# Altium PCB 多通道.PcbDoc (part 2 of 2)
Units mm, origin at the board's own origin, x right, y up, seen from the top; angles counter-clockwise.
Board outline 95 x 34 mm, 2 copper layers (Top Layer, Bottom Layer); 165 components, 129 nets, 558 pads, 145 vias.
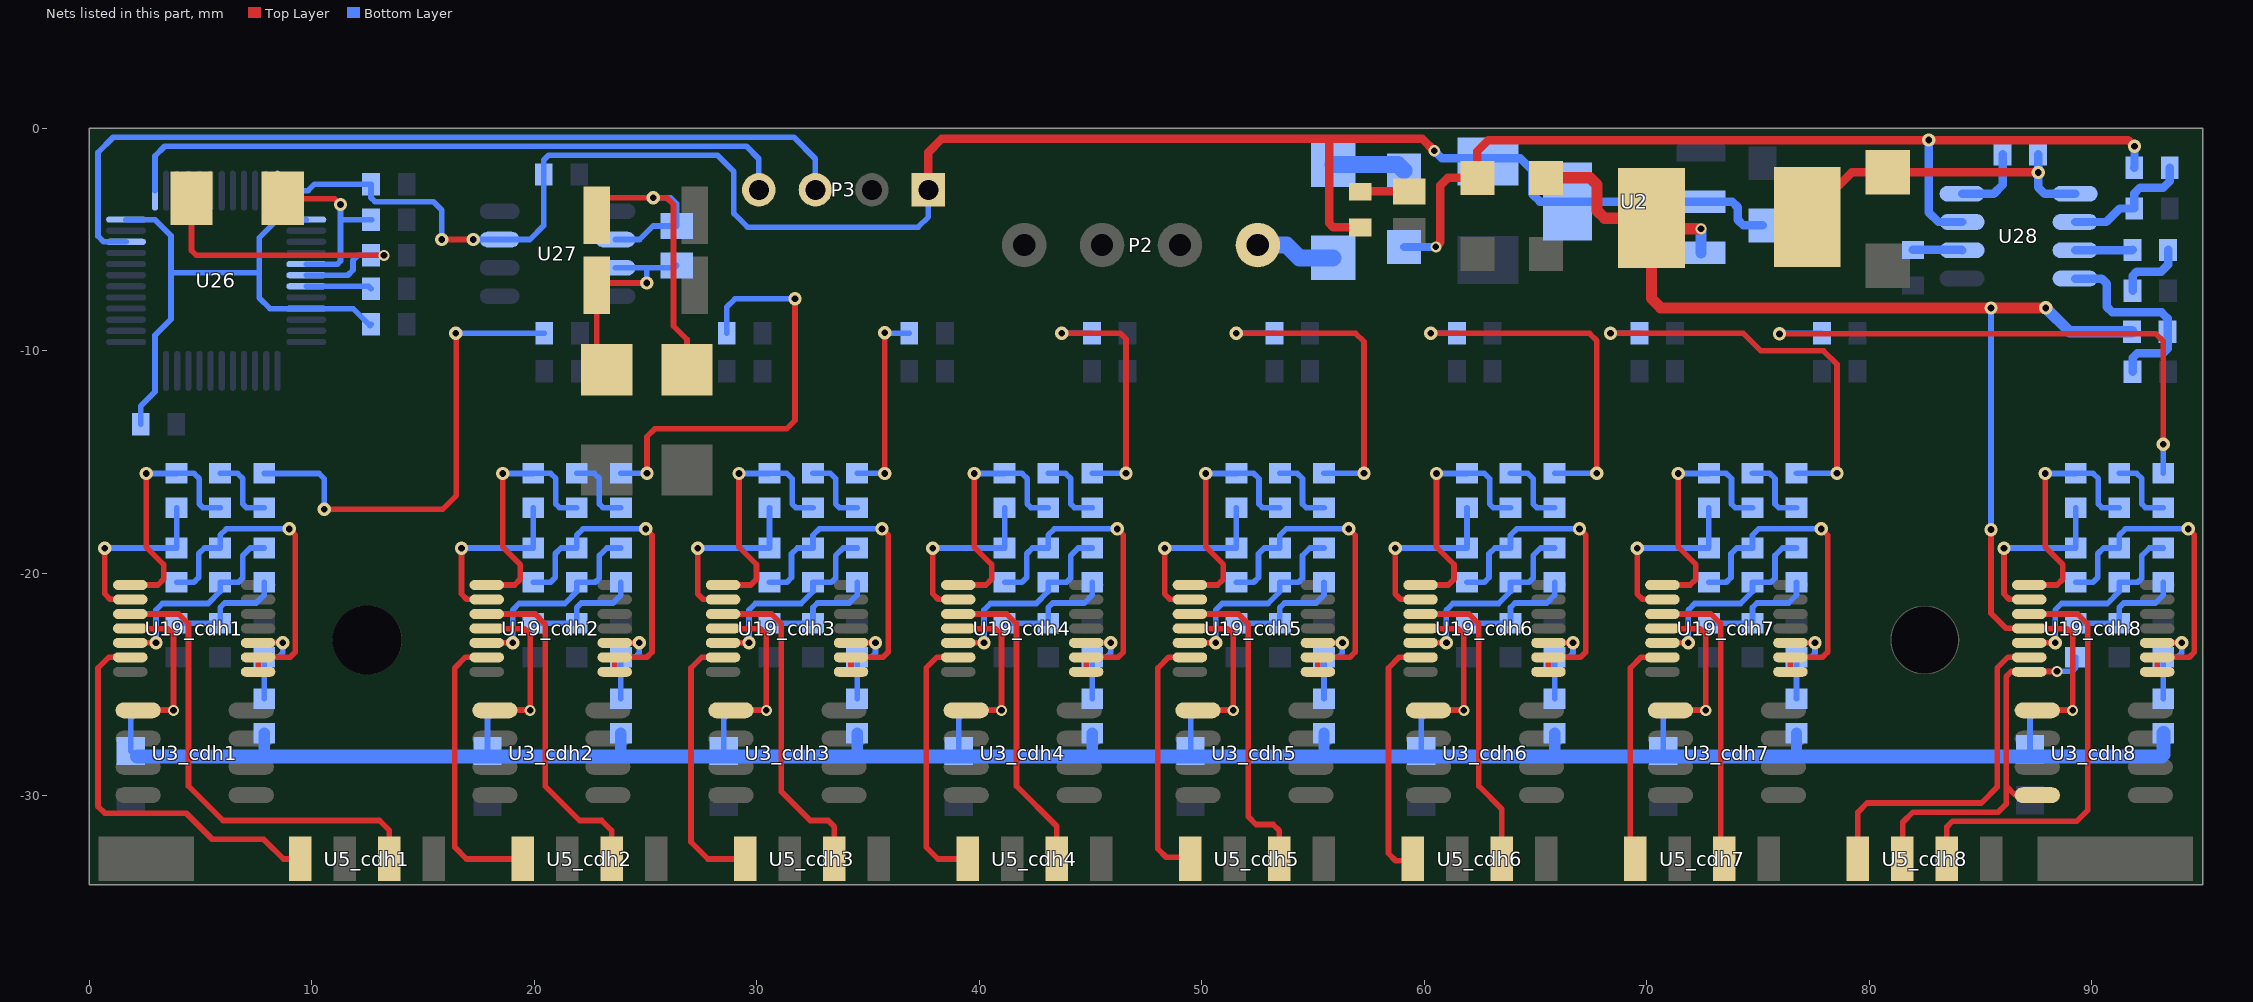
[diagram p2: the nets of this part, all layers, seen from the top]

## Via types
v1: diameter 0.6, hole 0.3, Top Layer to Bottom Layer, tented both sides, 103 vias
v2: diameter 0.5, hole 0.3, Top Layer to Bottom Layer, 39 vias
v3: diameter 0.5, hole 0.3, Top Layer to Bottom Layer, tented both sides, 3 vias

## Nets (pads, with @x,y where several pads share a name; then routed paths per layer and width w, separated by ;. In a path a pad name is that pad's centre, name@x,y a point inside that pad or via, vN(x,y) a via of type N, cw(c..) or ccw(c..) an arc to the next point about the centre after c; other vN are vias at no path point) (continued)
H1_IN3_cdh8: R18_cdh8.1 U3_cdh8.4 U5_cdh8.2 U19_cdh8.7 | length 16.7
  Top Layer w0.254: U5_cdh8.2@81.487,-32.842 81.509,-32.821 81.509,-31.191 81.966,-30.734 85.801,-30.734 86.157,-30.378 86.157,-29.566 ; U3_cdh8.4@86.553,-29.961 86.157,-29.566 ; v2@88.434,-24.418 86.376,-24.418 86.157,-24.638 86.157,-29.566 ; v2@88.434,-24.409 v2(88.443,-24.409)
  Bottom Layer w0.254: v2(88.443,-24.409) 89.103,-24.409 89.281,-24.232 R18_cdh8.1@89.281,-23.782
H1_OUT2_cdh1: U5_cdh1.3 U19_cdh1.3 | length 21.2
  Top Layer w0.254: U19_cdh1.3@1.849,-21.829 4.024,-21.829 4.47,-22.276 4.47,-29.566 6.02,-31.115 13.056,-31.115 13.487,-31.547 U5_cdh1.3@13.487,-32.842
H1_OUT2_cdh2: U5_cdh2.3 U19_cdh2.3 | length 15.2
  Top Layer w0.254: U19_cdh2.3@17.877,-21.829 20.051,-21.829 20.498,-22.276 20.498,-29.566 22.047,-31.115 23.038,-31.115 23.487,-31.565 U5_cdh2.3@23.487,-32.842
H1_OUT2_cdh3: U5_cdh3.3 U19_cdh3.3 | length 14.8
  Top Layer w0.254: U19_cdh3.3@28.494,-21.829 30.668,-21.829 31.115,-22.276 31.115,-29.82 32.41,-31.115 33.223,-31.115 33.487,-31.379 U5_cdh3.3@33.487,-32.842
H1_OUT2_cdh4: U5_cdh4.3 U19_cdh4.3 | length 14.1
  Top Layer w0.254: U19_cdh4.3@39.06,-21.829 41.235,-21.829 41.681,-22.276 41.681,-29.566 43.487,-31.372 U5_cdh4.3@43.487,-32.842
H1_OUT2_cdh5: U5_cdh5.3 U19_cdh5.3 | length 14.6
  Top Layer w0.254: U19_cdh5.3@49.474,-21.829 51.649,-21.829 52.095,-22.276 52.095,-30.937 52.451,-31.293 53.213,-31.293 53.487,-31.567 U5_cdh5.3@53.487,-32.842 U5_cdh5.3@53.638,-32.691
H1_OUT2_cdh6: U5_cdh6.3 U19_cdh6.3 | length 13.8
  Top Layer w0.254: U19_cdh6.3@59.838,-21.829 62.012,-21.829 62.459,-22.276 62.459,-29.566 63.487,-30.594 U5_cdh6.3@63.487,-32.842 U5_cdh6.3@63.5,-32.83
H1_OUT2_cdh7: U5_cdh7.3 U19_cdh7.3 | length 13.4
  Top Layer w0.254: U19_cdh7.3@70.709,-21.829 72.883,-21.829 73.33,-22.276 73.33,-32.685 U5_cdh7.3@73.487,-32.842
H1_OUT2_cdh8: U5_cdh8.3 U19_cdh8.3 | length 19.3
  Top Layer w0.254: U5_cdh8.3@83.487,-32.842 83.487,-31.397 83.744,-31.14 89.332,-31.14 89.814,-30.658 89.814,-22.276 89.368,-21.829 U19_cdh8.3@87.193,-21.829
H1_OUT4_cdh1: U5_cdh1.1 U19_cdh1.6 | length 17.9
  Top Layer w0.254: U19_cdh1.6@1.849,-23.779 1.839,-23.768 0.895,-23.768 0.406,-24.257 0.406,-30.48 0.711,-30.785 4.369,-30.785 5.537,-31.953 7.849,-31.953 8.738,-32.842 U5_cdh1.1@9.487,-32.842
H1_OUT4_cdh2: U5_cdh2.1 U19_cdh2.6 | length 13
  Top Layer w0.254: U19_cdh2.6@17.877,-23.779 17.866,-23.768 16.922,-23.768 16.434,-24.257 16.434,-32.309 16.967,-32.842 U5_cdh2.1@19.487,-32.842
H1_OUT4_cdh3: U5_cdh3.1 U19_cdh3.6 | length 12.2
  Top Layer w0.254: U19_cdh3.6@28.494,-23.779 28.483,-23.768 27.54,-23.768 27.051,-24.257 27.051,-32.08 27.813,-32.842 U5_cdh3.1@29.487,-32.842
H1_OUT4_cdh4: U5_cdh4.1 U19_cdh4.6 | length 11.8
  Top Layer w0.254: U19_cdh4.6@39.06,-23.779 39.05,-23.768 38.106,-23.768 37.617,-24.257 37.617,-32.309 38.151,-32.842 U5_cdh4.1@39.487,-32.842
H1_OUT4_cdh5: U5_cdh5.1 U19_cdh5.6 | length 17.4
  Top Layer w0.254: 48.031,-30.48 48.031,-24.257 48.52,-23.768 49.464,-23.768 U19_cdh5.6@49.474,-23.779 ; 48.031,-24.486 48.031,-32.385 48.412,-32.766 49.411,-32.766 U5_cdh5.1@49.487,-32.842
H1_OUT4_cdh6: U5_cdh6.1 U19_cdh6.6 | length 11.2
  Top Layer w0.254: U5_cdh6.1@59.487,-32.842 59.411,-32.918 58.725,-32.918 58.395,-32.588 58.395,-24.257 58.883,-23.768 59.827,-23.768 U19_cdh6.6@59.838,-23.779
H1_OUT4_cdh7: U5_cdh7.1 U19_cdh7.6 | length 10.3
  Top Layer w0.254: U5_cdh7.1@69.487,-32.842 69.266,-32.621 69.266,-24.257 69.754,-23.768 70.698,-23.768 U19_cdh7.6@70.709,-23.779
H1_OUT4_cdh8: U5_cdh8.1 U19_cdh8.6 | length 15.8
  Top Layer w0.254: U5_cdh8.1@79.487,-32.842 79.487,-30.749 79.908,-30.328 85.039,-30.328 85.75,-29.616 85.75,-24.257 86.239,-23.768 87.183,-23.768 U19_cdh8.6@87.193,-23.779
JTCK: P3.4 U26.37 | length 30.5
  Bottom Layer w0.254: U26.37@2.965,-2.808 2.965,-1.251 3.404,-0.813 29.54,-0.813 30.099,-1.372 P3.4@30.099,-2.769
JTMS: P3.3 U26.34 | length 39.4
  Bottom Layer w0.254: U26.34@1.665,-5.108 0.663,-5.108 0.406,-4.851 0.406,-1.092 1.092,-0.406 31.674,-0.406 32.639,-1.372 P3.3@32.639,-2.769
NetC16_1: C16.1 U26.5 Y1.1 | length 8.1
  Top Layer w0.254: Y1.1@8.788,-3.175 11.049,-3.175 v1(11.303,-3.429)
  Bottom Layer w0.254: U26.5@9.765,-6.108 11.164,-6.108 11.303,-5.969 v1(11.303,-3.429) ; 11.354,-4.115 C16.1@12.675,-4.115 C16.1@12.7,-4.115
NetC17_1: C17.1 U26.6 Y1.2 | length 15.2
  Top Layer w0.254: Y1.2@4.605,-3.15 4.605,-5.494 4.826,-5.715 v2(13.259,-5.715)
  Bottom Layer w0.254: U26.6@9.765,-6.608 11.629,-6.608 11.862,-6.375 11.862,-5.944 12.09,-5.715 C17.1@12.675,-5.715 v2(13.259,-5.715)
NetC21_1: C21.1 D12.2 L1.1 U28.1 | length 14.5
  Top Layer w0.381: L1.1@77.216,-3.988 79.214,-1.989 D12.2@80.823,-1.989 v1(87.596,-1.989)
  Bottom Layer w0.381: C21.1@87.592,-1.168 87.592,-2.654 87.884,-2.946 U28.1@89.256,-2.946
NetC21_2: C21.2 U28.8 | length 3.4
  Bottom Layer w0.381: U28.8@84.176,-2.946 85.598,-2.946 85.992,-2.553 C21.2@85.992,-1.168
NetC23_1: C23.1 F3.2 R107.1 U28.7 | length 43
  Top Layer w0.381: v3(60.528,-5.334) 60.731,-5.131 60.731,-2.565 61.067,-2.23 C23.1@62.393,-2.23 62.393,-1.031 62.89,-0.533 91.643,-0.533 v1(91.923,-0.813)
  Bottom Layer w0.381: F3.2@59.096,-5.34 60.523,-5.34 v3(60.528,-5.334) ; v1(82.677,-0.533) 82.677,-3.785 83.109,-4.216 U28.7@84.176,-4.216 ; R107.1@91.91,-1.778 91.923,-1.766 v1(91.923,-0.813)
NetC24_1: C24.1 R112.1 | length 3.1
  Bottom Layer w0.381: R112.1@91.834,-7.303 91.834,-6.642 92.024,-6.452 93.116,-6.452 93.434,-6.134 C24.1@93.434,-5.471
NetC24_2: C24.2 U28.3 | length 2.6
  Bottom Layer w0.381: U28.3@89.256,-5.486 91.819,-5.486 C24.2@91.834,-5.471
NetD10_A: D10.A R106.2 | length 2.2
  Top Layer w0.381: R106.2@57.138,-2.844 D10.A@59.334,-2.844
  Top Layer w0.508: R106.2@57.125,-2.858 R106.2@57.138,-2.844
NetD11_2: D11.2 F3.1 | length 3.3
  Bottom Layer w0.762: D11.2@55.905,-1.634 58.819,-1.634 F3.1@59.096,-1.911
NetD14_2: D14.2 F10.2 R105.2 U27.7 | length 9.8
  Top Layer w0.254: D14.2@23.266,-10.856 22.819,-10.409 F10.2@22.819,-7.061 22.921,-6.96 v1(25.07,-6.96)
  Bottom Layer w0.254: U27.7@23.657,-6.274 25.044,-6.274 ; v1(25.07,-6.96) 25.07,-6.299 25.044,-6.274 ; R105.2@26.416,-6.173 26.315,-6.274 25.044,-6.274
NetD15_2: D15.2 F11.2 R105.1 U27.6 | length 16.4
  Top Layer w0.254: F11.2@22.86,-3.124 v1(25.349,-3.124) 25.959,-3.124 26.264,-3.429 26.264,-8.89 26.873,-9.5 D15.2@26.873,-10.856
  Bottom Layer w0.254: U27.6@23.657,-5.004 24.74,-5.004 25.35,-4.393 R105.1@26.416,-4.393 26.416,-3.404 26.137,-3.124 v1(25.349,-3.124)
NetR3_cdh1_1: R3_cdh1.1 R14_cdh1.1 U19_cdh1.2 | length 8.4
  Top Layer w0.254: v1(0.711,-18.872) 0.711,-20.93 0.95,-21.168 1.86,-21.168 U19_cdh1.2@1.849,-21.179
  Bottom Layer w0.254: v1(0.711,-18.872) 0.719,-18.864 R14_cdh1.1@3.937,-18.864 R3_cdh1.1@3.937,-17.051
NetR3_cdh1_2: R3_cdh1.2 R4_cdh1.1 U19_cdh1.1 | length 11.3
  Top Layer w0.254: U19_cdh1.1@1.849,-20.529 3.093,-20.529 3.353,-20.269 3.353,-19.609 2.566,-18.822 v1(2.565,-15.519)
  Bottom Layer w0.254: v1(2.565,-15.519) 3.929,-15.519 R3_cdh1.2@3.937,-15.511 4.716,-15.511 4.953,-15.748 4.953,-16.891 5.113,-17.051 R4_cdh1.1@5.893,-17.051
NetR3_cdh2_1: R3_cdh2.1 R14_cdh2.1 U19_cdh2.2 | length 8.4
  Top Layer w0.254: v1(16.739,-18.872) 16.739,-20.93 16.977,-21.168 17.887,-21.168 U19_cdh2.2@17.877,-21.179
  Bottom Layer w0.254: v1(16.739,-18.872) 16.747,-18.864 R14_cdh2.1@19.964,-18.864 R3_cdh2.1@19.964,-17.051
NetR3_cdh2_2: R3_cdh2.2 R4_cdh2.1 U19_cdh2.1 | length 11.3
  Top Layer w0.254: U19_cdh2.1@17.877,-20.529 19.12,-20.529 19.38,-20.269 19.38,-19.609 18.593,-18.822 18.593,-17.947 ; 18.593,-17.947 v1(18.593,-15.519)
  Bottom Layer w0.254: v1(18.593,-15.519) 19.956,-15.519 R3_cdh2.2@19.964,-15.511 20.744,-15.511 20.98,-15.748 20.98,-16.891 21.141,-17.051 R4_cdh2.1@21.92,-17.051
NetR3_cdh3_1: R3_cdh3.1 R14_cdh3.1 U19_cdh3.2 | length 8.4
  Top Layer w0.254: v1(27.356,-18.872) 27.356,-20.93 27.595,-21.168 28.505,-21.168 U19_cdh3.2@28.494,-21.179
  Bottom Layer w0.254: v1(27.356,-18.872) 27.364,-18.864 R14_cdh3.1@30.582,-18.864 R3_cdh3.1@30.582,-17.051
NetR3_cdh3_2: R3_cdh3.2 R4_cdh3.1 U19_cdh3.1 | length 11.3
  Top Layer w0.254: U19_cdh3.1@28.494,-20.529 29.738,-20.529 29.997,-20.269 29.997,-19.609 29.211,-18.822 29.211,-17.947 ; 29.21,-17.947 v1(29.21,-15.519)
  Bottom Layer w0.254: v1(29.21,-15.519) 30.574,-15.519 R3_cdh3.2@30.582,-15.511 31.361,-15.511 31.598,-15.748 31.598,-16.891 31.758,-17.051 R4_cdh3.1@32.537,-17.051
NetR3_cdh4_1: R3_cdh4.1 R14_cdh4.1 U19_cdh4.2 | length 8.4
  Top Layer w0.254: v1(37.922,-18.872) 37.922,-20.93 38.161,-21.168 39.071,-21.168 U19_cdh4.2@39.06,-21.179
  Bottom Layer w0.254: v1(37.922,-18.872) 37.93,-18.864 R14_cdh4.1@41.148,-18.864 R3_cdh4.1@41.148,-17.051
NetR3_cdh4_2: R3_cdh4.2 R4_cdh4.1 U19_cdh4.1 | length 11.3
  Top Layer w0.254: U19_cdh4.1@39.06,-20.529 40.304,-20.529 40.564,-20.269 40.564,-19.609 39.777,-18.822 39.777,-17.947 ; 39.776,-17.947 v1(39.776,-15.519)
  Bottom Layer w0.254: v1(39.776,-15.519) 41.14,-15.519 R3_cdh4.2@41.148,-15.511 41.927,-15.511 42.164,-15.748 42.164,-16.891 42.324,-17.051 R4_cdh4.1@43.104,-17.051
NetR3_cdh5_1: R3_cdh5.1 R14_cdh5.1 U19_cdh5.2 | length 8.4
  Top Layer w0.254: v1(48.336,-18.872) 48.336,-20.93 48.575,-21.168 49.485,-21.168 U19_cdh5.2@49.474,-21.179
  Bottom Layer w0.254: v1(48.336,-18.872) 48.344,-18.864 R14_cdh5.1@51.562,-18.864 R3_cdh5.1@51.562,-17.051
NetR3_cdh5_2: R3_cdh5.2 R4_cdh5.1 U19_cdh5.1 | length 11.3
  Top Layer w0.254: U19_cdh5.1@49.474,-20.529 50.718,-20.529 50.978,-20.269 50.978,-19.609 50.191,-18.822 50.191,-17.947 ; 50.19,-17.947 v1(50.19,-15.519)
  Bottom Layer w0.254: v1(50.19,-15.519) 51.554,-15.519 R3_cdh5.2@51.562,-15.511 52.341,-15.511 52.578,-15.748 52.578,-16.891 52.738,-17.051 R4_cdh5.1@53.518,-17.051
NetR3_cdh6_1: R3_cdh6.1 R14_cdh6.1 U19_cdh6.2 | length 8.4
  Top Layer w0.254: v1(58.699,-18.872) 58.699,-20.93 58.938,-21.168 59.848,-21.168 U19_cdh6.2@59.838,-21.179
  Bottom Layer w0.254: v1(58.699,-18.872) 58.707,-18.864 R14_cdh6.1@61.925,-18.864 R3_cdh6.1@61.925,-17.051
NetR3_cdh6_2: R3_cdh6.2 R4_cdh6.1 U19_cdh6.1 | length 11.3
  Top Layer w0.254: U19_cdh6.1@59.838,-20.529 61.081,-20.529 61.341,-20.269 61.341,-19.609 60.554,-18.822 60.554,-17.947 ; 60.554,-17.947 v1(60.554,-15.519)
  Bottom Layer w0.254: v1(60.554,-15.519) 61.917,-15.519 R3_cdh6.2@61.925,-15.511 62.705,-15.511 62.941,-15.748 62.941,-16.891 63.102,-17.051 R4_cdh6.1@63.881,-17.051
NetR3_cdh7_1: R3_cdh7.1 R14_cdh7.1 U19_cdh7.2 | length 8.4
  Top Layer w0.254: v1(69.571,-18.872) 69.571,-20.93 69.809,-21.168 70.719,-21.168 U19_cdh7.2@70.709,-21.179
  Bottom Layer w0.254: v1(69.571,-18.872) 69.579,-18.864 R14_cdh7.1@72.796,-18.864 R3_cdh7.1@72.796,-17.051
NetR3_cdh7_2: R3_cdh7.2 R4_cdh7.1 U19_cdh7.1 | length 11.3
  Top Layer w0.254: U19_cdh7.1@70.709,-20.529 71.952,-20.529 72.212,-20.269 72.212,-19.609 71.425,-18.822 71.425,-17.947 ; 71.425,-17.947 v1(71.425,-15.519)
  Bottom Layer w0.254: v1(71.425,-15.519) 72.788,-15.519 R3_cdh7.2@72.796,-15.511 73.576,-15.511 73.812,-15.748 73.812,-16.891 73.973,-17.051 R4_cdh7.1@74.752,-17.051
NetR3_cdh8_1: R3_cdh8.1 R14_cdh8.1 U19_cdh8.2 | length 8.4
  Top Layer w0.254: v1(86.055,-18.872) 86.055,-20.93 86.294,-21.168 87.204,-21.168 U19_cdh8.2@87.193,-21.179
  Bottom Layer w0.254: v1(86.055,-18.872) 86.063,-18.864 R14_cdh8.1@89.281,-18.864 R3_cdh8.1@89.281,-17.051
NetR3_cdh8_2: R3_cdh8.2 R4_cdh8.1 U19_cdh8.1 | length 11.3
  Top Layer w0.254: U19_cdh8.1@87.193,-20.529 88.437,-20.529 88.697,-20.269 88.697,-19.609 87.91,-18.822 87.91,-17.947 ; 87.909,-17.947 v1(87.909,-15.519)
  Bottom Layer w0.254: v1(87.909,-15.519) 89.273,-15.519 R3_cdh8.2@89.281,-15.511 90.06,-15.511 90.297,-15.748 90.297,-16.891 90.457,-17.051 R4_cdh8.1@91.237,-17.051
NetR4_cdh1_2: R4_cdh1.2 R22_cdh1.1 | length 3.3
  Bottom Layer w0.254: R4_cdh1.2@5.893,-15.511 6.672,-15.511 6.909,-15.748 6.909,-16.891 7.069,-17.051 R22_cdh1.1@7.874,-17.051
NetR4_cdh2_2: R4_cdh2.2 R22_cdh2.1 | length 3.3
  Bottom Layer w0.254: R4_cdh2.2@21.92,-15.511 22.7,-15.511 22.936,-15.748 22.936,-16.891 23.097,-17.051 R22_cdh2.1@23.901,-17.051
NetR4_cdh3_2: R4_cdh3.2 R22_cdh3.1 | length 3.3
  Bottom Layer w0.254: R4_cdh3.2@32.537,-15.511 33.317,-15.511 33.553,-15.748 33.553,-16.891 33.714,-17.051 R22_cdh3.1@34.519,-17.051
NetR4_cdh4_2: R4_cdh4.2 R22_cdh4.1 | length 3.3
  Bottom Layer w0.254: R4_cdh4.2@43.104,-15.511 43.883,-15.511 44.12,-15.748 44.12,-16.891 44.28,-17.051 R22_cdh4.1@45.085,-17.051
NetR4_cdh5_2: R4_cdh5.2 R22_cdh5.1 | length 3.3
  Bottom Layer w0.254: R4_cdh5.2@53.518,-15.511 54.297,-15.511 54.534,-15.748 54.534,-16.891 54.694,-17.051 R22_cdh5.1@55.499,-17.051
NetR4_cdh6_2: R4_cdh6.2 R22_cdh6.1 | length 3.3
  Bottom Layer w0.254: R4_cdh6.2@63.881,-15.511 64.66,-15.511 64.897,-15.748 64.897,-16.891 65.057,-17.051 R22_cdh6.1@65.862,-17.051
NetR4_cdh7_2: R4_cdh7.2 R22_cdh7.1 | length 3.3
  Bottom Layer w0.254: R4_cdh7.2@74.752,-15.511 75.532,-15.511 75.768,-15.748 75.768,-16.891 75.929,-17.051 R22_cdh7.1@76.733,-17.051
NetR4_cdh8_2: R4_cdh8.2 R22_cdh8.1 | length 3.3
  Bottom Layer w0.254: R4_cdh8.2@91.237,-15.511 92.016,-15.511 92.253,-15.748 92.253,-16.891 92.413,-17.051 R22_cdh8.1@93.218,-17.051
NetR6_cdh1_2: R6_cdh1.2 R12_cdh1.1 R18_cdh1.2 | length 5.4
  Bottom Layer w0.254: R18_cdh1.2@3.937,-22.242 R6_cdh1.2@5.893,-22.242 5.893,-21.539 6.096,-21.336 7.518,-21.336 7.874,-20.98 R12_cdh1.1@7.874,-20.404
NetR6_cdh2_2: R6_cdh2.2 R12_cdh2.1 R18_cdh2.2 | length 5.4
  Bottom Layer w0.254: R18_cdh2.2@19.964,-22.242 R6_cdh2.2@21.92,-22.242 21.92,-21.539 22.123,-21.336 23.546,-21.336 23.901,-20.98 R12_cdh2.1@23.901,-20.404
NetR6_cdh3_2: R6_cdh3.2 R12_cdh3.1 R18_cdh3.2 | length 5.4
  Bottom Layer w0.254: R18_cdh3.2@30.582,-22.242 R6_cdh3.2@32.537,-22.242 32.537,-21.539 32.741,-21.336 34.163,-21.336 34.519,-20.98 R12_cdh3.1@34.519,-20.404
NetR6_cdh4_2: R6_cdh4.2 R12_cdh4.1 R18_cdh4.2 | length 5.4
  Bottom Layer w0.254: R18_cdh4.2@41.148,-22.242 R6_cdh4.2@43.104,-22.242 43.104,-21.539 43.307,-21.336 44.729,-21.336 45.085,-20.98 R12_cdh4.1@45.085,-20.404
NetR6_cdh5_2: R6_cdh5.2 R12_cdh5.1 R18_cdh5.2 | length 5.4
  Bottom Layer w0.254: R18_cdh5.2@51.562,-22.242 R6_cdh5.2@53.518,-22.242 53.518,-21.539 53.721,-21.336 55.143,-21.336 55.499,-20.98 R12_cdh5.1@55.499,-20.404
NetR6_cdh6_2: R6_cdh6.2 R12_cdh6.1 R18_cdh6.2 | length 5.4
  Bottom Layer w0.254: R18_cdh6.2@61.925,-22.242 R6_cdh6.2@63.881,-22.242 63.881,-21.539 64.084,-21.336 65.507,-21.336 65.862,-20.98 R12_cdh6.1@65.862,-20.404
NetR6_cdh7_2: R6_cdh7.2 R12_cdh7.1 R18_cdh7.2 | length 5.4
  Bottom Layer w0.254: R18_cdh7.2@72.796,-22.242 R6_cdh7.2@74.752,-22.242 74.752,-21.539 74.955,-21.336 76.378,-21.336 76.733,-20.98 R12_cdh7.1@76.733,-20.404
NetR6_cdh8_2: R6_cdh8.2 R12_cdh8.1 R18_cdh8.2 | length 5.4
  Bottom Layer w0.254: R18_cdh8.2@89.281,-22.242 R6_cdh8.2@91.237,-22.242 91.237,-21.539 91.44,-21.336 92.862,-21.336 93.218,-20.98 R12_cdh8.1@93.218,-20.404
NetR12_cdh1_2: R12_cdh1.2 R13_cdh1.1 U19_cdh1.5 | length 9.5
  Top Layer w0.254: U19_cdh1.5@1.849,-23.129 v1(3.012,-23.129)
  Bottom Layer w0.254: v1(3.012,-23.129) 3.012,-21.651 3.302,-21.361 5.359,-21.361 5.893,-20.828 R13_cdh1.1@5.893,-20.404 6.723,-20.404 6.909,-20.218 6.909,-19.202 7.247,-18.864 R12_cdh1.2@7.874,-18.864
NetR12_cdh2_2: R12_cdh2.2 R13_cdh2.1 U19_cdh2.5 | length 9.5
  Top Layer w0.254: U19_cdh2.5@17.877,-23.129 v1(19.04,-23.129)
  Bottom Layer w0.254: v1(19.04,-23.129) 19.04,-21.651 19.329,-21.361 21.387,-21.361 21.92,-20.828 R13_cdh2.1@21.92,-20.404 22.75,-20.404 22.936,-20.218 22.936,-19.202 23.274,-18.864 R12_cdh2.2@23.901,-18.864
NetR12_cdh3_2: R12_cdh3.2 R13_cdh3.1 U19_cdh3.5 | length 9.5
  Top Layer w0.254: U19_cdh3.5@28.494,-23.129 v1(29.657,-23.129)
  Bottom Layer w0.254: v1(29.657,-23.129) 29.657,-21.651 29.947,-21.361 32.004,-21.361 32.537,-20.828 R13_cdh3.1@32.537,-20.404 33.368,-20.404 33.553,-20.218 33.553,-19.202 33.892,-18.864 R12_cdh3.2@34.519,-18.864
NetR12_cdh4_2: R12_cdh4.2 R13_cdh4.1 U19_cdh4.5 | length 9.5
  Top Layer w0.254: U19_cdh4.5@39.06,-23.129 v1(40.223,-23.129)
  Bottom Layer w0.254: v1(40.223,-23.129) 40.223,-21.651 40.513,-21.361 42.57,-21.361 43.104,-20.828 R13_cdh4.1@43.104,-20.404 43.934,-20.404 44.12,-20.218 44.12,-19.202 44.458,-18.864 R12_cdh4.2@45.085,-18.864
NetR12_cdh5_2: R12_cdh5.2 R13_cdh5.1 U19_cdh5.5 | length 9.5
  Top Layer w0.254: U19_cdh5.5@49.474,-23.129 v1(50.637,-23.129)
  Bottom Layer w0.254: v1(50.637,-23.129) 50.637,-21.651 50.927,-21.361 52.984,-21.361 53.518,-20.828 R13_cdh5.1@53.518,-20.404 54.348,-20.404 54.534,-20.218 54.534,-19.202 54.872,-18.864 R12_cdh5.2@55.499,-18.864
NetR12_cdh6_2: R12_cdh6.2 R13_cdh6.1 U19_cdh6.5 | length 9.5
  Top Layer w0.254: U19_cdh6.5@59.838,-23.129 v1(61,-23.129)
  Bottom Layer w0.254: v1(61,-23.129) 61,-21.651 61.29,-21.361 63.348,-21.361 63.881,-20.828 R13_cdh6.1@63.881,-20.404 64.711,-20.404 64.897,-20.218 64.897,-19.202 65.235,-18.864 R12_cdh6.2@65.862,-18.864
NetR12_cdh7_2: R12_cdh7.2 R13_cdh7.1 U19_cdh7.5 | length 9.5
  Top Layer w0.254: U19_cdh7.5@70.709,-23.129 v1(71.872,-23.129)
  Bottom Layer w0.254: v1(71.872,-23.129) 71.872,-21.651 72.161,-21.361 74.219,-21.361 74.752,-20.828 R13_cdh7.1@74.752,-20.404 75.582,-20.404 75.768,-20.218 75.768,-19.202 76.106,-18.864 R12_cdh7.2@76.733,-18.864
NetR12_cdh8_2: R12_cdh8.2 R13_cdh8.1 U19_cdh8.5 | length 9.5
  Top Layer w0.254: U19_cdh8.5@87.193,-23.129 v1(88.356,-23.129)
  Bottom Layer w0.254: v1(88.356,-23.129) 88.356,-21.651 88.646,-21.361 90.703,-21.361 91.237,-20.828 R13_cdh8.1@91.237,-20.404 92.067,-20.404 92.253,-20.218 92.253,-19.202 92.591,-18.864 R12_cdh8.2@93.218,-18.864
NetR13_cdh1_2: R13_cdh1.2 R14_cdh1.2 U19_cdh1.8 U19_cdh1.9 | length 15.1
  Top Layer w0.254: U19_cdh1.8@7.599,-24.429 U19_cdh1.9@7.599,-23.779 9.038,-23.779 9.271,-23.546 9.271,-18.288 v1(8.992,-18.009)
  Bottom Layer w0.254: R14_cdh1.2@3.937,-20.404 4.716,-20.404 4.928,-20.193 4.928,-19.126 5.19,-18.864 R13_cdh1.2@5.893,-18.864 5.893,-18.288 6.172,-18.009 v1(8.992,-18.009)
NetR13_cdh2_2: R13_cdh2.2 R14_cdh2.2 U19_cdh2.8 U19_cdh2.9 | length 15.1
  Top Layer w0.254: U19_cdh2.8@23.627,-24.429 U19_cdh2.9@23.627,-23.779 25.065,-23.779 25.298,-23.546 25.298,-18.288 v1(25.019,-18.009)
  Bottom Layer w0.254: R14_cdh2.2@19.964,-20.404 20.744,-20.404 20.955,-20.193 20.955,-19.126 21.217,-18.864 R13_cdh2.2@21.92,-18.864 21.92,-18.288 22.2,-18.009 v1(25.019,-18.009)
NetR13_cdh3_2: R13_cdh3.2 R14_cdh3.2 U19_cdh3.8 U19_cdh3.9 | length 15.1
  Top Layer w0.254: U19_cdh3.8@34.244,-24.429 U19_cdh3.9@34.244,-23.779 35.682,-23.779 35.916,-23.546 35.916,-18.288 v1(35.636,-18.009)
  Bottom Layer w0.254: R14_cdh3.2@30.582,-20.404 31.361,-20.404 31.572,-20.193 31.572,-19.126 31.834,-18.864 R13_cdh3.2@32.537,-18.864 32.537,-18.288 32.817,-18.009 v1(35.636,-18.009)
NetR13_cdh4_2: R13_cdh4.2 R14_cdh4.2 U19_cdh4.8 U19_cdh4.9 | length 15.1
  Top Layer w0.254: U19_cdh4.8@44.81,-24.429 U19_cdh4.9@44.81,-23.779 46.249,-23.779 46.482,-23.546 46.482,-18.288 v1(46.203,-18.009)
  Bottom Layer w0.254: R14_cdh4.2@41.148,-20.404 41.927,-20.404 42.139,-20.193 42.139,-19.126 42.401,-18.864 R13_cdh4.2@43.104,-18.864 43.104,-18.288 43.383,-18.009 v1(46.203,-18.009)
NetR13_cdh5_2: R13_cdh5.2 R14_cdh5.2 U19_cdh5.8 U19_cdh5.9 | length 15.1
  Top Layer w0.254: U19_cdh5.8@55.224,-24.429 U19_cdh5.9@55.224,-23.779 56.663,-23.779 56.896,-23.546 56.896,-18.288 v1(56.617,-18.009)
  Bottom Layer w0.254: R14_cdh5.2@51.562,-20.404 52.341,-20.404 52.553,-20.193 52.553,-19.126 52.815,-18.864 R13_cdh5.2@53.518,-18.864 53.518,-18.288 53.797,-18.009 v1(56.617,-18.009)
NetR13_cdh6_2: R13_cdh6.2 R14_cdh6.2 U19_cdh6.8 U19_cdh6.9 | length 15.1
  Top Layer w0.254: U19_cdh6.8@65.588,-24.429 U19_cdh6.9@65.588,-23.779 67.026,-23.779 67.259,-23.546 67.259,-18.288 v1(66.98,-18.009)
  Bottom Layer w0.254: R14_cdh6.2@61.925,-20.404 62.705,-20.404 62.916,-20.193 62.916,-19.126 63.178,-18.864 R13_cdh6.2@63.881,-18.864 63.881,-18.288 64.16,-18.009 v1(66.98,-18.009)
NetR13_cdh7_2: R13_cdh7.2 R14_cdh7.2 U19_cdh7.8 U19_cdh7.9 | length 15.1
  Top Layer w0.254: U19_cdh7.8@76.459,-24.429 U19_cdh7.9@76.459,-23.779 77.897,-23.779 78.13,-23.546 78.13,-18.288 v1(77.851,-18.009)
  Bottom Layer w0.254: R14_cdh7.2@72.796,-20.404 73.576,-20.404 73.787,-20.193 73.787,-19.126 74.049,-18.864 R13_cdh7.2@74.752,-18.864 74.752,-18.288 75.032,-18.009 v1(77.851,-18.009)
NetR13_cdh8_2: R13_cdh8.2 R14_cdh8.2 U19_cdh8.8 U19_cdh8.9 | length 15.1
  Top Layer w0.254: U19_cdh8.8@92.943,-24.429 U19_cdh8.9@92.943,-23.779 94.382,-23.779 94.615,-23.546 94.615,-18.288 v1(94.336,-18.009)
  Bottom Layer w0.254: R14_cdh8.2@89.281,-20.404 90.06,-20.404 90.272,-20.193 90.272,-19.126 90.534,-18.864 R13_cdh8.2@91.237,-18.864 91.237,-18.288 91.516,-18.009 v1(94.336,-18.009)
NetR16_cdh1_1: R16_cdh1.1 R22_cdh1.2 | length 21.6
  Top Layer w0.254: v1(10.566,-17.12) 15.9,-17.12 16.51,-16.51 v1@16.51,-9.22
  Bottom Layer w0.254: R22_cdh1.2@7.874,-15.511 7.882,-15.519 10.338,-15.519 10.566,-15.748 v1(10.566,-17.12) ; v1(16.485,-9.22) R16_cdh1.1@20.46,-9.22
NetR16_cdh2_1: R16_cdh2.1 R22_cdh2.2 | length 19.6
  Top Layer w0.254: v1(25.078,-15.511) 25.078,-13.86 25.425,-13.513 31.344,-13.513 31.725,-13.132 v1(31.725,-7.671)
  Bottom Layer w0.254: R22_cdh2.2@23.901,-15.511 v1(25.078,-15.511) ; R16_cdh2.1@28.662,-9.22 28.662,-8.041 29.032,-7.671 v1(31.725,-7.671)
NetR16_cdh3_1: R16_cdh3.1 R22_cdh3.2 | length 8.7
  Top Layer w0.254: v1(35.763,-15.519) v1(35.763,-9.195)
  Bottom Layer w0.254: R22_cdh3.2@34.519,-15.511 v1@35.763,-15.511 ; v1@35.763,-9.22 R16_cdh3.1@36.865,-9.22
NetR16_cdh4_1: R16_cdh4.1 R22_cdh4.2 | length 11.9
  Top Layer w0.254: v1(43.713,-9.22) 46.355,-9.22 46.601,-9.466 v1(46.601,-15.511)
  Bottom Layer w0.254: v1(43.713,-9.22) R16_cdh4.1@45.067,-9.22 ; R22_cdh4.2@45.085,-15.511 v1(46.601,-15.511)
NetR16_cdh5_1: R16_cdh5.1 R22_cdh5.2 | length 15.3
  Top Layer w0.254: v1(51.562,-9.22) 56.921,-9.22 57.294,-9.593 v1(57.294,-15.511)
  Bottom Layer w0.254: v1(51.562,-9.22) R16_cdh5.1@53.269,-9.22 ; R22_cdh5.2@55.499,-15.511 v1(57.294,-15.511)
NetR16_cdh6_1: R16_cdh6.1 R22_cdh6.2 | length 16.6
  Top Layer w0.254: v1(60.3,-9.22) 67.437,-9.22 67.759,-9.542 v1(67.759,-15.511)
  Bottom Layer w0.254: v1(60.3,-9.22) R16_cdh6.1@61.472,-9.22 ; R22_cdh6.2@65.862,-15.511 v1(67.759,-15.511)
NetR16_cdh7_1: R16_cdh7.1 R22_cdh7.2 | length 18.8
  Top Layer w0.254: v1(68.377,-9.22) 74.346,-9.22 75.133,-10.008 77.953,-10.008 78.554,-10.609 v1(78.554,-15.511)
  Bottom Layer w0.254: v1(68.377,-9.22) R16_cdh7.1@69.674,-9.22 ; R22_cdh7.2@76.733,-15.511 v1(78.554,-15.511)
NetR16_cdh8_1: R16_cdh8.1 R22_cdh8.2 | length 25.2
  Top Layer w0.254: v1(75.971,-9.246) 92.888,-9.246 93.218,-9.576 v1(93.218,-14.199)
  Bottom Layer w0.254: v1@75.997,-9.22 R16_cdh8.1@77.876,-9.22 ; R22_cdh8.2@93.218,-15.511 v1(93.218,-14.199)
NetR24_cdh1_1: R24_cdh1.1 R26_cdh1.2 U19_cdh1.10 | length 4.3
  Top Layer w0.254: U19_cdh1.10@7.599,-23.129 v1(8.702,-23.129)
  Bottom Layer w0.254: R24_cdh1.1@7.874,-25.646 R26_cdh1.2@7.874,-23.782 8.501,-23.782 8.702,-23.582 v1(8.702,-23.129)
NetR24_cdh2_1: R24_cdh2.1 R26_cdh2.2 U19_cdh2.10 | length 4.3
  Top Layer w0.254: U19_cdh2.10@23.627,-23.129 v1(24.729,-23.129)
  Bottom Layer w0.254: R24_cdh2.1@23.901,-25.646 R26_cdh2.2@23.901,-23.782 24.528,-23.782 24.729,-23.582 v1(24.729,-23.129)
NetR24_cdh3_1: R24_cdh3.1 R26_cdh3.2 U19_cdh3.10 | length 4.3
  Top Layer w0.254: U19_cdh3.10@34.244,-23.129 v1(35.346,-23.129)
  Bottom Layer w0.254: R24_cdh3.1@34.519,-25.646 R26_cdh3.2@34.519,-23.782 35.146,-23.782 35.346,-23.582 v1(35.346,-23.129)
NetR24_cdh4_1: R24_cdh4.1 R26_cdh4.2 U19_cdh4.10 | length 4.3
  Top Layer w0.254: U19_cdh4.10@44.81,-23.129 v1(45.913,-23.129)
  Bottom Layer w0.254: R24_cdh4.1@45.085,-25.646 R26_cdh4.2@45.085,-23.782 45.712,-23.782 45.913,-23.582 v1(45.913,-23.129)
NetR24_cdh5_1: R24_cdh5.1 R26_cdh5.2 U19_cdh5.10 | length 4.3
  Top Layer w0.254: U19_cdh5.10@55.224,-23.129 v1(56.327,-23.129)
  Bottom Layer w0.254: R24_cdh5.1@55.499,-25.646 R26_cdh5.2@55.499,-23.782 56.126,-23.782 56.327,-23.582 v1(56.327,-23.129)
NetR24_cdh6_1: R24_cdh6.1 R26_cdh6.2 U19_cdh6.10 | length 4.3
  Top Layer w0.254: U19_cdh6.10@65.588,-23.129 v1(66.69,-23.129)
  Bottom Layer w0.254: R24_cdh6.1@65.862,-25.646 R26_cdh6.2@65.862,-23.782 66.489,-23.782 66.69,-23.582 v1(66.69,-23.129)
NetR24_cdh7_1: R24_cdh7.1 R26_cdh7.2 U19_cdh7.10 | length 4.3
  Top Layer w0.254: U19_cdh7.10@76.459,-23.129 v1(77.561,-23.129)
  Bottom Layer w0.254: R24_cdh7.1@76.733,-25.646 R26_cdh7.2@76.733,-23.782 77.36,-23.782 77.561,-23.582 v1(77.561,-23.129)
NetR24_cdh8_1: R24_cdh8.1 R26_cdh8.2 U19_cdh8.10 | length 4.3
  Top Layer w0.254: U19_cdh8.10@92.943,-23.129 v1(94.046,-23.129)
  Bottom Layer w0.254: R24_cdh8.1@93.218,-25.646 R26_cdh8.2@93.218,-23.782 93.845,-23.782 94.046,-23.582 v1(94.046,-23.129)
NetR107_2: R107.2 R109.1 U28.2 | length 6
  Bottom Layer w0.381: U28.2@89.256,-4.216 90.653,-4.216 91.26,-3.609 R109.1@91.91,-3.609 91.91,-2.933 92.177,-2.667 93.218,-2.667 93.51,-2.375 R107.2@93.51,-1.778
NetR108_1: R108.1 R110.1 U28.4 | length 9.2
  Bottom Layer w0.381: U28.4@89.256,-6.756 90.449,-6.756 90.678,-6.985 90.678,-8.026 90.932,-8.28 93.142,-8.28 93.408,-8.547 R108.1@93.408,-9.144 93.408,-9.919 93.223,-10.105 92.054,-10.105 91.834,-10.325 R110.1@91.834,-10.947
NetR111_1: R111.1 U28.6 | length 2.2
  Bottom Layer w0.381: R111.1@81.966,-5.474 84.163,-5.474 U28.6@84.176,-5.486
NRST: C18.2 U26.7 | length 3
  Bottom Layer w0.254: U26.7@9.765,-7.108 12.569,-7.108 C18.2@12.675,-7.214
VCC3.3: C12.1 C13.1 C15.1 C19.1 C20.1 D13.1 P3.1 R106.1 U2.2 U26.1 U26.9 U26.24 U26.36 U26.48 U27.3 | length 113.3
  Top Layer w0.254: v1(15.85,-5.004) v1(17.272,-5.004)
  Top Layer w0.381: P3.1@37.719,-2.769 37.719,-1.079 38.329,-0.47 55.728,-0.47 ; R106.1@57.125,-4.458 55.918,-4.458 55.728,-4.267 55.728,-0.47 ; v3(60.452,-1.016) 59.906,-0.47 55.728,-0.47
  Bottom Layer w0.254: U26.36@1.665,-4.108 2.972,-4.108 2.965,-4.115 3.683,-4.833 3.683,-6.502 ; C12.1@2.324,-13.31 2.324,-12.484 2.965,-11.843 U26.24@2.965,-10.908 2.965,-9.303 3.683,-8.585 3.683,-6.502 ; U26.1@9.765,-4.108 8.465,-4.108 ; C15.1@12.675,-8.814 12.624,-8.865 11.867,-8.108 U26.9@9.765,-8.108 8.133,-8.108 7.645,-7.62 7.645,-6.477 ; v1(15.85,-5.004) 15.85,-3.683 15.469,-3.302 12.852,-3.302 12.675,-3.124 C13.1@12.675,-2.515 10.135,-2.515 9.841,-2.808 U26.48@8.465,-2.808 8.465,-4.108 ; v1(17.272,-5.004) 19.812,-5.004 20.434,-4.381 C19.1@20.434,-2.083 20.434,-1.435 20.65,-1.219 28.245,-1.219 28.981,-1.956 28.981,-3.835 29.591,-4.445 37.262,-4.445 37.719,-3.988 P3.1@37.719,-2.769 ; 3.683,-6.502 7.62,-6.502 7.645,-6.477 ; 7.645,-6.477 7.645,-4.928 8.465,-4.108
  Bottom Layer w0.381: v3(60.452,-1.016) 60.782,-1.346 64.313,-1.346 64.846,-1.88 64.846,-2.946 65.202,-3.302 U2.2@66.444,-3.302 U2.2@72.444,-3.302 73.838,-3.302 74.092,-3.556 74.092,-4.115 74.346,-4.369 C20.1@75.209,-4.369
VCC8: C2_cdh1.2 C2_cdh2.2 C2_cdh3.2 C2_cdh4.2 C2_cdh5.2 C2_cdh6.2 C2_cdh7.2 C2_cdh8.2 C22.2 L1.2 R24_cdh1.2 R24_cdh2.2 R24_cdh3.2 R24_cdh4.2 R24_cdh5.2 R24_cdh6.2 R24_cdh7.2 R24_cdh8.2 R108.2 U2.3 U3_cdh1.1 U3_cdh2.1 U3_cdh3.1 U3_cdh4.1 U3_cdh5.1 U3_cdh6.1 U3_cdh7.1 U3_cdh8.1 U19_cdh1.4 U19_cdh2.4 U19_cdh3.4 U19_cdh4.4 U19_cdh5.4 U19_cdh6.4 U19_cdh7.4 U19_cdh8.4 | length 235.3
  Top Layer w0.254: U19_cdh1.4@1.849,-22.479 1.864,-22.494 3.531,-22.494 3.797,-22.76 v2(3.797,-26.162) U3_cdh1.1@2.21,-26.162 ; U19_cdh2.4@17.877,-22.479 17.892,-22.494 19.558,-22.494 19.824,-22.76 v2(19.824,-26.162) U3_cdh2.1@18.237,-26.162 ; U19_cdh3.4@28.494,-22.479 28.509,-22.494 30.175,-22.494 30.441,-22.76 v2(30.441,-26.162) U3_cdh3.1@28.854,-26.162 ; U19_cdh4.4@39.06,-22.479 39.075,-22.494 40.742,-22.494 41.008,-22.76 v2(41.008,-26.162) U3_cdh4.1@39.421,-26.162 ; U19_cdh5.4@49.474,-22.479 49.489,-22.494 51.156,-22.494 51.422,-22.76 v2(51.422,-26.162) U3_cdh5.1@49.835,-26.162 ; U19_cdh6.4@59.838,-22.479 59.852,-22.494 61.519,-22.494 61.785,-22.76 v2(61.785,-26.162) U3_cdh6.1@60.198,-26.162 ; U19_cdh7.4@70.709,-22.479 70.724,-22.494 72.39,-22.494 72.656,-22.76 v2(72.656,-26.162) U3_cdh7.1@71.069,-26.162 ; v1(85.476,-18.039) 85.476,-21.798 86.157,-22.479 U19_cdh8.4@87.193,-22.479 87.208,-22.494 88.875,-22.494 89.141,-22.76 v2(89.141,-26.162) U3_cdh8.1@87.554,-26.162
  Top Layer w0.508: C22.2@65.471,-2.23 67.457,-2.23 67.767,-2.54 67.767,-3.708 68.103,-4.044 L1.2@70.216,-4.044 L1.2@70.216,-4.343 ; v3(72.444,-4.524) 70.397,-4.524 L1.2@70.216,-4.343 ; v1(87.935,-8.077) 70.637,-8.077 70.216,-7.656 L1.2@70.216,-4.343
  Bottom Layer w0.254: C2_cdh1.2@1.88,-27.991 1.88,-26.518 2.235,-26.162 v2(3.797,-26.162) ; C2_cdh2.2@17.907,-27.991 17.907,-26.518 18.263,-26.162 v2(19.824,-26.162) ; C2_cdh3.2@28.524,-27.991 28.524,-26.518 28.88,-26.162 v2(30.441,-26.162) ; C2_cdh4.2@39.091,-27.991 39.091,-26.518 39.446,-26.162 v2(41.008,-26.162) ; C2_cdh5.2@49.505,-27.991 49.505,-26.518 49.86,-26.162 v2(51.422,-26.162) ; C2_cdh6.2@59.868,-27.991 59.868,-26.518 60.223,-26.162 v2(61.785,-26.162) ; C2_cdh7.2@70.739,-27.991 70.739,-26.518 71.095,-26.162 v2(72.656,-26.162) ; v1(85.476,-18.039) v1(85.476,-8.082) ; C2_cdh8.2@87.224,-27.991 87.224,-26.518 87.579,-26.162 v2(89.141,-26.162)
  Bottom Layer w0.508: R24_cdh1.2@7.874,-27.186 7.874,-28.18 7.925,-28.23 ; R24_cdh2.2@23.901,-27.186 23.901,-28.18 23.952,-28.23 ; R24_cdh3.2@34.519,-27.186 34.519,-28.18 34.569,-28.23 ; R24_cdh4.2@45.085,-27.186 45.085,-28.18 45.136,-28.23 ; R24_cdh5.2@55.499,-27.186 55.499,-28.18 55.55,-28.23 ; R24_cdh6.2@65.862,-27.186 65.862,-28.18 65.913,-28.23 ; U2.3@72.444,-5.602 v3(72.444,-4.524) ; R24_cdh7.2@76.733,-27.186 76.733,-28.18 76.784,-28.23 ; v1(87.935,-8.077) 89.002,-9.144 R108.2@91.808,-9.144
  Bottom Layer w0.635: C2_cdh1.2@2.17,-28.23 7.925,-28.23 23.952,-28.23 34.569,-28.23 45.136,-28.23 55.55,-28.23 65.913,-28.23 76.784,-28.23 93.142,-28.23 93.218,-28.154 R24_cdh8.2@93.218,-27.186
VCC24: D11.1 P2.1 | length 3.6
  Bottom Layer w0.762: P2.1@52.527,-5.251 53.816,-5.251 54.399,-5.834 D11.1@55.905,-5.834
pads on no net: U3_cdh1.5 U3_cdh1.6 U3_cdh1.7 U3_cdh1.8 U3_cdh2.5 U3_cdh2.6 U3_cdh2.7 U3_cdh2.8 U3_cdh3.5 U3_cdh3.6 U3_cdh3.7 U3_cdh3.8 U3_cdh4.5 U3_cdh4.6 U3_cdh4.7 U3_cdh4.8 U3_cdh5.5 U3_cdh5.6 U3_cdh5.7 U3_cdh5.8 U3_cdh6.5 U3_cdh6.6 U3_cdh6.7 U3_cdh6.8 U3_cdh7.5 U3_cdh7.6 U3_cdh7.7 U3_cdh7.8 U3_cdh8.5 U3_cdh8.6 U3_cdh8.7 U3_cdh8.8 U19_cdh1.12 U19_cdh1.13 U19_cdh1.14 U19_cdh2.12 U19_cdh2.13 U19_cdh2.14 U19_cdh3.12 U19_cdh3.13 U19_cdh3.14 U19_cdh4.12 U19_cdh4.13 U19_cdh4.14 U19_cdh5.12 U19_cdh5.13 U19_cdh5.14 U19_cdh6.12 U19_cdh6.13 U19_cdh6.14 U19_cdh7.12 U19_cdh7.13 U19_cdh7.14 U19_cdh8.12 U19_cdh8.13 U19_cdh8.14 U26.2 U26.3 U26.4 U26.18 U26.19 U26.20 U26.21 U26.22 U26.25 U26.26 U26.27 U26.28 U26.29 U26.30 U26.31 U26.32 U26.33 U26.38 U26.39 U26.40 U26.41 U26.42 U26.43 U27.5

## Polygon pours and split planes (outlines as drawn)
GND on Bottom Layer "Top Layer-No Net" (hatched 90Degree grid 0.203 track 0.203, remove dead copper, pour order 4): 0,0 95,0 95,-34 0,-34 0,0
GND on Top Layer "Top Layer-No Net" (hatched 90Degree grid 0.203 track 0.203, remove dead copper, pour order 2): 0,0 95,0 95,-34 0,-34 0,0

## Keep-outs
Keep-Out Layer:
  the board outline again, w0.254

## Other copper
Top Layer:
  pour cut-out: 71.78,-0.635 71.78,-7.544 75.667,-7.544 75.667,-0.686 75.616,-0.635
  pour cut-out: 71.78,-0.635 71.806,-0.66 75.641,-0.66 75.641,-7.422 75.519,-7.544 71.78,-7.544

## Silkscreen, mask and mechanical layers (free items; w line width, h text height)
Top Overlay:
  circle w0.1: c35.118,-5.476 r1
  circle w0.1: c37.76,-5.476 r1
  circle w0.1: c48.976,-7.94 r1
  circle w0.1: c52.476,-7.94 r1
  circle w0.1: c45.476,-7.94 r1
  circle w0.1: c82.497,-23 r2.6
  circle w0.1: c12.497,-23 r2.6
  circle w0.1: c41.976,-7.94 r1
  text "-" at 34.722,-5.893 h1
  text "3" at 37.414,-5.969 h1
  text "L" at 45.288,-8.433 h1.2
  text "-" at 48.514,-8.509 h1.2
  text "+" at 52.045,-8.509 h1.2
  text "H" at 41.605,-8.534 h1.2
Bottom Overlay:
  circle w0.254: c82.497,-23 r2.7
  circle w0.254: c12.497,-23 r2.7
  text "CDH02" at 93.32,-32.258 h0.7
  text "VER:180115" at 94.209,-33.452 h0.7